# Altium PCB ignore_testboard.PcbDoc (part 2 of 2)
Units mm, origin at the board's own origin, x right, y up, seen from the top; angles counter-clockwise.
Board outline 90 x 50 mm, 2 copper layers (Top Layer, Bottom Layer); 147 components, 148 nets, 497 pads, 0 vias.
Unrouted connection lines stored in the file: 235.
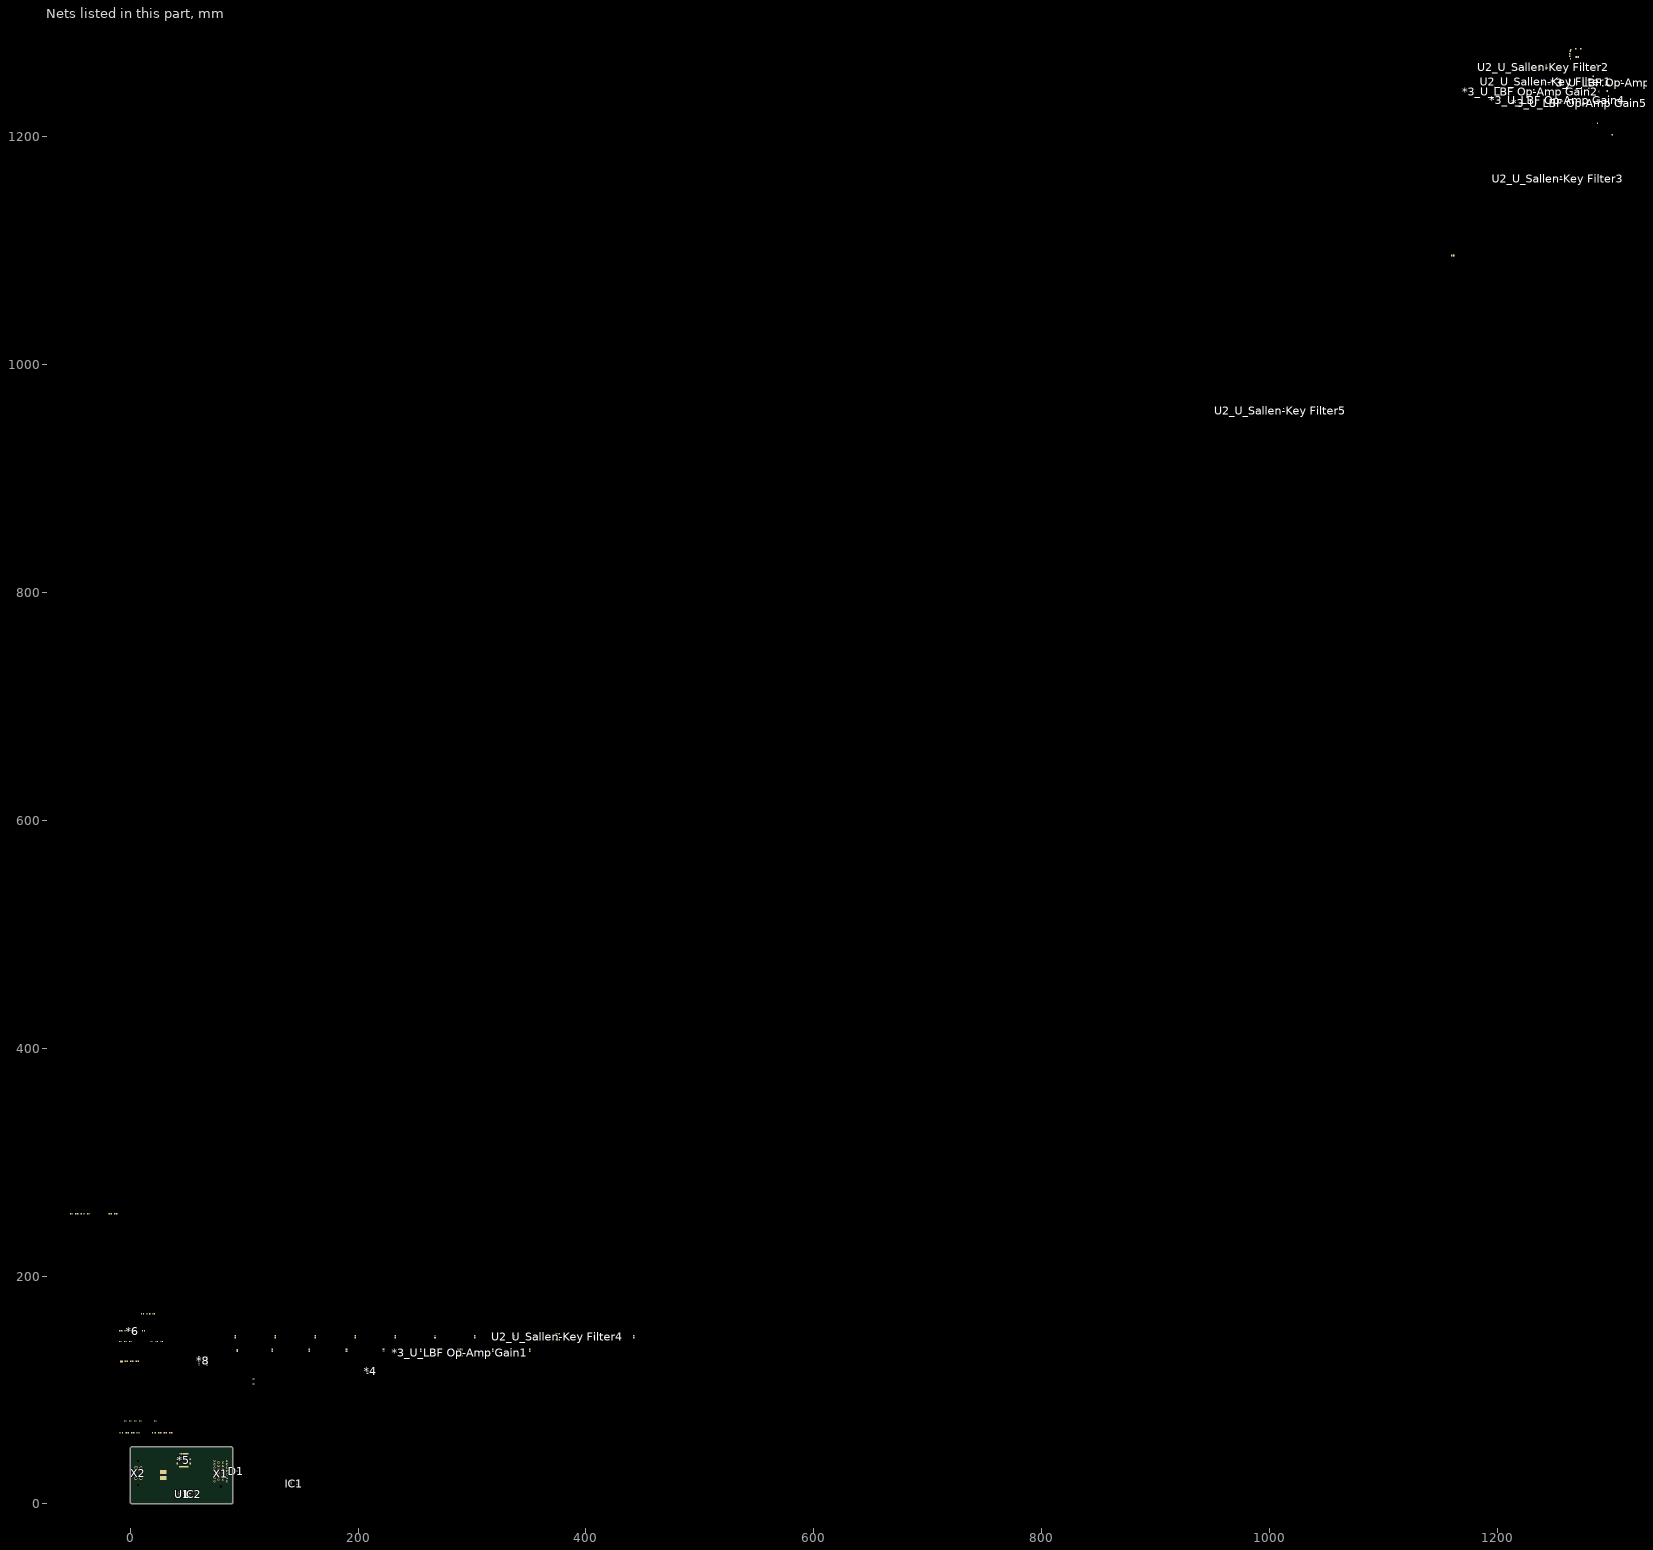
[diagram p2: the nets of this part, all layers, seen from the top]

## Part data
*1 *2 *7: library part 2, Manufacturer_id=1, Package=0805, Brightness=7mcd, Drawer_id=1, Id=20mA, idLED=2, Link=https://www.digikey.com/product-detail/en/visual-communications-company-vcc/CMD17-21VGD-TR8/L62505CT-ND/254936, Name=CMD17_0805_GREEN, Vf=2.1V
"*3_U_LBF Op-Amp Gain1" "*3_U_LBF Op-Amp Gain2" "*3_U_LBF Op-Amp Gain3" "*3_U_LBF Op-Amp Gain4" "*3_U_LBF Op-Amp Gain5" "U2_U_Sallen-Key Filter1" "U2_U_Sallen-Key Filter2" "U2_U_Sallen-Key Filter3" "U2_U_Sallen-Key Filter4" "U2_U_Sallen-Key Filter5": library part 1, "IC OPAMP JFET 5MHZ 8SO", Package=8-SO, Supplier1PartNo=LT1057IS8#PBF-ND, Supply_Voltage=10~18, Amplifier_Type=JFET, Created_By="Albert Panuco", Drawer_id=1, GBW=5MHz, idOp_Amp=1, Link=https://www.digikey.com/product-detail/en/linear-technology-analog-devices/LT1057IS8-PBF/LT1057IS8-PBF-ND/961410, Manufacturer_id=1, MfrPartNo=LT1057IS8#PBF, Name="OPAMP JFET", Num_Circuits=2, Slew_Rate="13 V/us", Supplier1=Digikey
*4: library part 14, "IC REG SWTCHD CAP INV 10MA 8SOIC", Current_Rating=10mA, Manufacturer_id=1, MfrPartNo=MAX680CSA, Package=SOIC-8, ComponentLink1Description=Null, ComponentLink1URL=Null, Created_By="Albert Panuco", Drawer_id=1, Dropout_Voltage=Null, idPMIC_Lin=14, Link=https://www.digikey.com/product-detail/en/maxim-integrated/MAX680CSA/MAX680CSA-ND/142563, Name=MAX680CSA, Num_Outputs=2, Output_Config=Fixed, Power=Null, Supplier1=Null, Supplier1PartNo=Null, Updated_By=Null, Vin(Max)=6V, Vin(Min)=2V, Vout(Max)=10V, Vout(Min)=+2Vin, Vout_Type=Null
*5 *10: library part 1, Drawer_id=1, Manufacturer_id=1
  *5: idMCU=1, Name="MKE18F512VLH16 MCU"
  *10: idLED=1, Name=LED_0805_RED, Vf=0.7V
*6: library part 6, "MOSFET N-CHANNEL 30V 5A SOT23", Manufacturer_id=1, Package=SOT-23, Created_By=Angel, Drawer_id=1, Id=5A, idFETs=6, Link=https://www.digikey.com/product-detail/en/micro-commercial-co/SI3434-TP/SI3434-TPMSCT-ND/7681700, MfrPartNo=SI3434-TP, Name=SI3434-TP, Num_Circuits=1, Rds_On=44Ohms, Supplier1=Digi-Key, Vdss=30V, Vgs(Max)=1V, Vgs(typ)=800mV
*8: library part 3, Manufacturer_id=1, Created_By=Kyle, Drawer_id=1, idIC_Interface=3, Link=https://www.digikey.com/product-detail/en/ftdi-future-technology-devices-international-ltd/FT232RL-REEL/768-1007-1-ND/1836402, MfrPartNo=FT232RL, Name="USB FTDI", Protocol=UART, Vin(Max)=5.25, Vin(Min)=3.3
*9: library part 2, Manufacturer_id=1, Brightness=35mcd, Drawer_id=1, Id=20mA, idLED=2, Name=LED_0805_GREEN, Vf=2V
C1 C2 C3 C4: library part 711, Dielectric=Ceramic, Manufacturer_id=1, Package="CAP 0805/2012", Voltage_Rating=25V, Created_By="Nick Mah", Created_Date=10/20/2018, Drawer_id=1, idCapacitor=711, Name="Cap_2.2uf_25V_CAP 0805/2012"
C5: library part 943, Dielectric=Ceramic, Manufacturer_id=1, Package="CAP 0603/1608", Voltage_Rating=50V, Created_By="Nick Mah", Created_Date=10/20/2018, Drawer_id=1, idCapacitor=943, Name="Cap_0.10uf_50V_CAP 0603/1608"
C6: library part 929, Dielectric=Ceramic, Manufacturer_id=1, Package="CAP 0603/1608", Voltage_Rating=50V, Created_By="Nick Mah", Created_Date=10/20/2018, Drawer_id=1, idCapacitor=929, Name="Cap_4700pf_50V_CAP 0603/1608"
"C7_U_LBF Op-Amp Gain1" "C7_U_LBF Op-Amp Gain2" "C7_U_LBF Op-Amp Gain3" "C7_U_LBF Op-Amp Gain4" "C7_U_LBF Op-Amp Gain5" "C8_U_LBF Op-Amp Gain1" "C8_U_LBF Op-Amp Gain2" "C8_U_LBF Op-Amp Gain3" "C8_U_LBF Op-Amp Gain4" "C8_U_LBF Op-Amp Gain5": library part 341, Dielectric=Ceramic, Manufacturer_id=1, Package="CAP 0805/2012", Voltage_Rating=16V, Created_By="Nick Mah", Created_Date=10/20/2018, Drawer_id=1, idCapacitor=341, Name="Cap_0.047uf_16V_CAP 0805/2012"
C9 C10 C11 C12: library part 353, Dielectric=Ceramic, Manufacturer_id=1, Package="CAP 0805/2012", Voltage_Rating=16V, Created_By="Nick Mah", Created_Date=10/20/2018, Drawer_id=1, idCapacitor=353, Name="Cap_4.7uf_16V_CAP 0805/2012"
C13: library part 223, Dielectric=Ceramic, Manufacturer_id=1, Package="CAP 0603/1608", Voltage_Rating=16V, Created_By="Nick Mah", Created_Date=10/20/2018, Drawer_id=1, idCapacitor=223, Name="Cap_0.10uf_16V_CAP 0603/1608"
C14 C16 C23 C24 C25: library part 583, Dielectric=Ceramic, Manufacturer_id=1, Package="CAP 0603/1608", Voltage_Rating=25V, Created_By="Nick Mah", Created_Date=10/20/2018, Drawer_id=1, idCapacitor=583, Name="Cap_0.10uf_25V_CAP 0603/1608"
C15: library part 529, Dielectric=Ceramic, Manufacturer_id=1, Package="CAP 0603/1608", Voltage_Rating=25V, Created_By="Nick Mah", Created_Date=10/20/2018, Drawer_id=1, idCapacitor=529, Name="Cap_100pf_25V_CAP 0603/1608"
"C17_U_Sallen-Key Filter1" "C17_U_Sallen-Key Filter2" "C17_U_Sallen-Key Filter3" "C17_U_Sallen-Key Filter4" "C17_U_Sallen-Key Filter5" "C18_U_Sallen-Key Filter1" "C18_U_Sallen-Key Filter2" "C18_U_Sallen-Key Filter3" "C18_U_Sallen-Key Filter4" "C18_U_Sallen-Key Filter5" "C20_U_Sallen-Key Filter1" "C20_U_Sallen-Key Filter2" "C20_U_Sallen-Key Filter3" "C20_U_Sallen-Key Filter4" "C20_U_Sallen-Key Filter5" "C21_U_Sallen-Key Filter1" "C21_U_Sallen-Key Filter2" "C21_U_Sallen-Key Filter3" "C21_U_Sallen-Key Filter4" "C21_U_Sallen-Key Filter5": library part 703, Dielectric=Ceramic, Manufacturer_id=1, Package="CAP 0805/2012", Voltage_Rating=25V, Created_By="Nick Mah", Created_Date=10/20/2018, Drawer_id=1, idCapacitor=703, Name="Cap_0.10uf_25V_CAP 0805/2012"
"C19_U_Sallen-Key Filter1" "C19_U_Sallen-Key Filter2" "C19_U_Sallen-Key Filter3" "C19_U_Sallen-Key Filter4" "C19_U_Sallen-Key Filter5" "C22_U_Sallen-Key Filter1" "C22_U_Sallen-Key Filter2" "C22_U_Sallen-Key Filter3" "C22_U_Sallen-Key Filter4" "C22_U_Sallen-Key Filter5": library part 681, Dielectric=Ceramic, Manufacturer_id=1, Package="CAP 0805/2012", Voltage_Rating=25V, Created_By="Nick Mah", Created_Date=10/20/2018, Drawer_id=1, idCapacitor=681, Name="Cap_2200pf_25V_CAP 0805/2012"
D1: library part 7, "ESD Protection Diode", Manufacturer_id=1, Package=SOT-23, Power=350W, Supplier1PartNo=NUP1105LT1GOSCT-ND, ComponentLink1URL=https://www.digikey.com/product-detail/en/on-semiconductor/NUP1105LT1G/NUP1105LT1GOSCT-ND/2122067, Drawer_id=1, Ic=8A, idDiode=7, Link=https://www.digikey.com/product-detail/en/on-semiconductor/NUP1105LT1G/NUP1105LT1GOSCT-ND/2122067, MfrPartNo=NUP1105LT1G, Name=SOT-23_350W_Zener, Num_Circuits=1, Supplier1=Digikey, Type=Zener
D5: library part 12, "DIODE SCHOTTKY 30V 5A TMINIP2", Manufacturer_id=1, MfrPartNo=DB2431200L, Package=SOD-128, Power=30V, Supplier1PartNo=DB2431200LCT-ND, ComponentLink1Description=Datasheet, ComponentLink1URL=https://industrial.panasonic.com/content/data/SC/ds/ds4/DB2431200L_E.pdf, Drawer_id=1, Ic=5A, idDiode=12, Link=https://www.digikey.com/product-detail/en/panasonic-electronic-components/DB2431200L/DB2431200LCT-ND/3884430, Name=DB2431200L, Num_Circuits=1, Supplier1=Digi-Key, Type=Schottky
IC1 IC2: library part 10, "IC VREF SERIES 5V 8SOIC", Manufacturer_id=1, MfrPartNo=MAX6350CSA+, Package=SOIC-8, Created_By="Albert Panuco", Drawer_id=1, idPMIC_Lin=10, Link=https://www.digikey.com/product-detail/en/maxim-integrated/MAX6350CSA/MAX6350CSA-ND/1867176, Name=MAX6350CSA+_5V_Ref, Num_Outputs=1, Output_Config=5V, Updated_By="Albert Panuco", Vin(Max)=40V, Vout(Max)=12V
"PTC Fuse1": library part 4, "Fuse", Manufacturer_id=1, MfrPartNo=2920L200, Created_By="Eunice Bernardo", Created_Date=10/27/2018, Drawer_id=1, I_hold=2A, I_max=40A, I_trip=4A, idFuse=4, LatestRevisionDate=17-Jul-2002, LatestRevisionNote="Re-released for DXP Platform.", Link=https://www.digikey.com/product-detail/en/littelfuse-inc/2920L200-24DR/F2872TR-ND/1211346, Name="PTC Poly Fuse Resettable", PackageDescription="Thru-Hole; 2 Leads", PackageReference=PIN-W2/E2.8, Published=8-Jun-2000, Publisher="Altium Limited"
R1 R2 R16: library part 497, Manufacturer_id=1, Package=0805, Power=1/10W, Tolerance=1%, ComponentLink1Description=Datasheet, Created_By="Nick Mah", Created_Date=2018-10-20, Drawer_id=1, idResistor=497, Name=Res_470_0805_1/10W_1%, Supplier 1=Digi-Key
R3 R4: library part 1340, Manufacturer_id=1, Package=0603, Power=1/10W, Tolerance=5%, ComponentLink1Description=Datasheet, Created_By="Nick Mah", Created_Date=2018-10-20, Drawer_id=1, idResistor=1340, Name=Res_62_0603_1/10W_5%, Supplier 1=Digi-Key
R5: library part 2293, Manufacturer_id=1, Package=0603, Power=1/10W, Tolerance=10%, ComponentLink1Description=Datasheet, Created_By="Nick Mah", Created_Date=2018-10-20, Drawer_id=1, idResistor=2293, Name=Res_100_0603_1/10W_10%, Supplier 1=Digi-Key
"R6_U_LBF Op-Amp Gain1" "R6_U_LBF Op-Amp Gain2" "R6_U_LBF Op-Amp Gain3" "R6_U_LBF Op-Amp Gain4" "R6_U_LBF Op-Amp Gain5" "R7_U_LBF Op-Amp Gain1" "R7_U_LBF Op-Amp Gain2" "R7_U_LBF Op-Amp Gain3" "R7_U_LBF Op-Amp Gain4" "R7_U_LBF Op-Amp Gain5" "R8_U_LBF Op-Amp Gain1" "R8_U_LBF Op-Amp Gain2" "R8_U_LBF Op-Amp Gain3" "R8_U_LBF Op-Amp Gain4" "R8_U_LBF Op-Amp Gain5" "R9_U_LBF Op-Amp Gain1" "R9_U_LBF Op-Amp Gain2" "R9_U_LBF Op-Amp Gain3" "R9_U_LBF Op-Amp Gain4" "R9_U_LBF Op-Amp Gain5" "R10_U_LBF Op-Amp Gain1" "R10_U_LBF Op-Amp Gain2" "R10_U_LBF Op-Amp Gain3" "R10_U_LBF Op-Amp Gain4" "R10_U_LBF Op-Amp Gain5" "R11_U_LBF Op-Amp Gain1" "R11_U_LBF Op-Amp Gain2" "R11_U_LBF Op-Amp Gain3" "R11_U_LBF Op-Amp Gain4" "R11_U_LBF Op-Amp Gain5": library part 513, Manufacturer_id=1, Package=0805, Power=1/10W, Tolerance=1%, ComponentLink1Description=Datasheet, Created_By="Nick Mah", Created_Date=2018-10-20, Drawer_id=1, idResistor=513, Name=Res_2.2k_0805_1/10W_1%, Supplier 1=Digi-Key
R12: library part 313, Manufacturer_id=1, Package=0603, Power=1/10W, Tolerance=1%, ComponentLink1Description=Datasheet, Created_By="Nick Mah", Created_Date=2018-10-20, Drawer_id=1, idResistor=313, Name=Res_10k_0603_1/10W_1%, Supplier 1=Digi-Key
R13: library part 1393, Manufacturer_id=1, Package=0603, Power=1/10W, Tolerance=5%, ComponentLink1Description=Datasheet, Created_By="Nick Mah", Created_Date=2018-10-20, Drawer_id=1, idResistor=1393, Name=Res_10k_0603_1/10W_5%, Supplier 1=Digi-Key
R17: library part 545, Manufacturer_id=1, Package=0805, Power=1/10W, Tolerance=1%, ComponentLink1Description=Datasheet, Created_By="Nick Mah", Created_Date=2018-10-20, Drawer_id=1, idResistor=545, Name=Res_47k_0805_1/10W_1%, Supplier 1=Digi-Key
"R18_U_Sallen-Key Filter1" "R18_U_Sallen-Key Filter2" "R18_U_Sallen-Key Filter3" "R18_U_Sallen-Key Filter4" "R18_U_Sallen-Key Filter5" "R20_U_Sallen-Key Filter1" "R20_U_Sallen-Key Filter2" "R20_U_Sallen-Key Filter3" "R20_U_Sallen-Key Filter4" "R20_U_Sallen-Key Filter5": library part 538, Manufacturer_id=1, Package=0805, Power=1/10W, Tolerance=1%, ComponentLink1Description=Datasheet, Created_By="Nick Mah", Created_Date=2018-10-20, Drawer_id=1, idResistor=538, Name=Res_24k_0805_1/10W_1%, Supplier 1=Digi-Key
"R19_U_Sallen-Key Filter1" "R19_U_Sallen-Key Filter2" "R19_U_Sallen-Key Filter3" "R19_U_Sallen-Key Filter4" "R19_U_Sallen-Key Filter5" "R21_U_Sallen-Key Filter1" "R21_U_Sallen-Key Filter2" "R21_U_Sallen-Key Filter3" "R21_U_Sallen-Key Filter4" "R21_U_Sallen-Key Filter5": library part 528, Manufacturer_id=1, Package=0805, Power=1/10W, Tolerance=1%, ComponentLink1Description=Datasheet, Created_By="Nick Mah", Created_Date=2018-10-20, Drawer_id=1, idResistor=528, Name=Res_9.1k_0805_1/10W_1%, Supplier 1=Digi-Key
R22 R23 R24 R25: library part 721, Manufacturer_id=1, Package=0805, Power=1/4W, Tolerance=1%, ComponentLink1Description=Datasheet, Created_By="Nick Mah", Created_Date=2018-10-20, Drawer_id=1, idResistor=721, Name=Res_1.0k_0805_1/4W_1%, Supplier 1=Digi-Key
U1: library part 5, Manufacturer_id=1, MfrPartNo=MCP2561, Package=SOIC-8, Created_By="Angel Delgado", Data_Rate=1Mbps, Drawer_id=1, idIC_Interface=5, Link=https://www.digikey.com/product-detail/en/microchip-technology/MCP2561T-E-SN/MCP2561T-E-SNCT-ND/5148846, Name="CAN Transceiver", Num_Circuits=1, Protocol=CAN, Type=Transceiver, Vin(Max)=5.5V, Vin(Min)=4.5V
X1: library part 7, "Straight Angle 26Pos AMPSeal", Manufacturer_id=5, Supplier1PartNo=A123256-ND, Voltage_Rating=250V, ComponentLink1Description=Drawing, ComponentLink1URL=https://www.te.com/commerce/DocumentDelivery/DDEController?Action=srchrtrv&DocNm=1437288-6&DocType=Customer+Drawing&DocLang=JP, Created_By=Nick, Drawer_id=1, idConn=7, Link=https://www.digikey.com/product-detail/en/te-connectivity-amp-connectors/6437288-6/A123256-ND/2329274, MfrPartNo=6437288-6, Name="AMP SuperSeal Straight", Num_Contacts=26, Num_Rows=4, Pitch=3mm, Supplier1=Digi-Key
X2: library part 15, "2 row 4 pin Board", Manufacturer_id=1, ComponentLink1Description=Datasheet, Created_By=Angel, Drawer_id=1, idConn=15, Link=https://www.te.com/usa-en/product-DTF13-4P.html, MfrPartNo=DTF13-4P, Name=DTF13-4P, Num_Contacts=4, Supplier1=TE

## Nets (pads, with @x,y where several pads share a name; then routed paths per layer and width w, separated by ;. In a path a pad name is that pad's centre, name@x,y a point inside that pad or via, vN(x,y) a via of type N, cw(c..) or ccw(c..) an arc to the next point about the centre after c; other vN are vias at no path point)
12V: "PTC Fuse1.1" *6.3 C1.2 C3.2 D5.2 IC1.2 IC2.2 R16.2
"12V PWR": "PTC Fuse1.2" X2.1
+10V: "*3_U_LBF Op-Amp Gain1.6" "*3_U_LBF Op-Amp Gain2.6" "*3_U_LBF Op-Amp Gain3.6" "*3_U_LBF Op-Amp Gain4.6" "*3_U_LBF Op-Amp Gain5.6" "C18_U_Sallen-Key Filter1.2" "C18_U_Sallen-Key Filter2.2" "C18_U_Sallen-Key Filter3.2" "C18_U_Sallen-Key Filter4.2" "C18_U_Sallen-Key Filter5.2" "C21_U_Sallen-Key Filter1.1" "U2_U_Sallen-Key Filter1.2" "U2_U_Sallen-Key Filter1.6" "U2_U_Sallen-Key Filter2.6" "U2_U_Sallen-Key Filter3.6" "U2_U_Sallen-Key Filter4.6" "U2_U_Sallen-Key Filter5.6" *4.8 C9.1
-10V: "*3_U_LBF Op-Amp Gain1.2" "*3_U_LBF Op-Amp Gain2.2" "*3_U_LBF Op-Amp Gain3.2" "*3_U_LBF Op-Amp Gain4.2" "*3_U_LBF Op-Amp Gain5.2" "C21_U_Sallen-Key Filter2.1" "C21_U_Sallen-Key Filter3.1" "C21_U_Sallen-Key Filter4.1" "C21_U_Sallen-Key Filter5.1" "U2_U_Sallen-Key Filter2.2" "U2_U_Sallen-Key Filter3.2" "U2_U_Sallen-Key Filter4.2" "U2_U_Sallen-Key Filter5.2" *4.4 C12.2
AGND: "C8_U_LBF Op-Amp Gain1.1" "C8_U_LBF Op-Amp Gain2.1" "C8_U_LBF Op-Amp Gain3.1" "C8_U_LBF Op-Amp Gain4.1" "C8_U_LBF Op-Amp Gain5.1" "C18_U_Sallen-Key Filter1.1" "C18_U_Sallen-Key Filter2.1" "C18_U_Sallen-Key Filter3.1" "C18_U_Sallen-Key Filter4.1" "C18_U_Sallen-Key Filter5.1" "C19_U_Sallen-Key Filter1.1" "C19_U_Sallen-Key Filter2.1" "C19_U_Sallen-Key Filter3.1" "C19_U_Sallen-Key Filter4.1" "C19_U_Sallen-Key Filter5.1" "C21_U_Sallen-Key Filter1.2" "C21_U_Sallen-Key Filter2.2" "C21_U_Sallen-Key Filter3.2" "C21_U_Sallen-Key Filter4.2" "C21_U_Sallen-Key Filter5.2" "C22_U_Sallen-Key Filter1.1" "C22_U_Sallen-Key Filter2.1" "C22_U_Sallen-Key Filter3.1" "C22_U_Sallen-Key Filter4.1" "C22_U_Sallen-Key Filter5.1" "R6_U_LBF Op-Amp Gain1.1" "R6_U_LBF Op-Amp Gain2.1" "R6_U_LBF Op-Amp Gain3.1" "R6_U_LBF Op-Amp Gain4.1" "R6_U_LBF Op-Amp Gain5.1" "R9_U_LBF Op-Amp Gain1.1" "R9_U_LBF Op-Amp Gain2.1" "R9_U_LBF Op-Amp Gain3.1" "R9_U_LBF Op-Amp Gain4.1" "R9_U_LBF Op-Amp Gain5.1" *1.2 *2.2 *4.5 *5.10 *5.40 *8.7 *8.18 *8.21 *8.25 *8.26 C1.1 C2.1 C3.1 C4.1 C5.1 C6.1 C12.1 C13.1 C14.1 C15.1 C16.1 C24.1 C25.1 D1.3 IC1.4 IC2.4 R5.1 U1.2 X1.19 X1.20 X1.21 X1.22 X1.23 X1.24 X1.25 X1.26 X2.2
AVCC: *4.6 *5.8 *5.9 C4.2 C9.2 C14.2 IC2.6 R2.1 X1.6 X1.7 X1.8 X1.9 X1.10 X1.11 X1.12 X1.13
CAN_H: D1.1 R4.2 U1.7 X2.4
CAN_L: D1.2 R3.1 U1.6 X2.3
D_N: *8.16
D_P: *8.15
DVCC: *5.7 *5.41 *8.4 *8.19 *8.20 C2.2 C5.2 C15.2 C16.2 C24.2 IC1.6 R1.1 R12.2 R13.2 U1.3
DVCC_5V: R24.2 R25.2
FTDI_GREEN: *8.23 *9.2
FTDI_RED: *8.22 *10.2
FTDI_UART_RX: *5.48 R23.2
FTDI_UART_TX: *5.47 R22.2
GND: *6.2 *7.2 D5.1 R17.1
"IN 1": "R18_U_Sallen-Key Filter2.1" X1.1
"IN 2": "R20_U_Sallen-Key Filter2.1" X1.2
"IN 3": "R18_U_Sallen-Key Filter3.1" X1.3
"IN 4": "R20_U_Sallen-Key Filter3.1" X1.4
"IN 5": "R18_U_Sallen-Key Filter5.1" X1.5
"IN 6": "R20_U_Sallen-Key Filter5.1" X1.14
"IN 7": "R18_U_Sallen-Key Filter4.1" X1.15
"IN 8": "R20_U_Sallen-Key Filter4.1" X1.16
"IN 9": "R18_U_Sallen-Key Filter1.1" X1.17
"IN 10": "R20_U_Sallen-Key Filter1.1" X1.18
JTAG_TMS: R12.1
Net*1_1: *1.1 R1.2
Net*2_1: *2.1 R2.2
"Net*3_U_LBF Op-Amp Gain1_1": "*3_U_LBF Op-Amp Gain1.1" "C7_U_LBF Op-Amp Gain1.2" "R8_U_LBF Op-Amp Gain1.2"
"Net*3_U_LBF Op-Amp Gain1_3": "*3_U_LBF Op-Amp Gain1.3" "R9_U_LBF Op-Amp Gain1.2" "R10_U_LBF Op-Amp Gain1.1"
"Net*3_U_LBF Op-Amp Gain1_4": "*3_U_LBF Op-Amp Gain1.4" "C8_U_LBF Op-Amp Gain1.2" "R11_U_LBF Op-Amp Gain1.2"
"Net*3_U_LBF Op-Amp Gain1_5": "*3_U_LBF Op-Amp Gain1.5" "R10_U_LBF Op-Amp Gain1.2" *5.32
"Net*3_U_LBF Op-Amp Gain1_7": "*3_U_LBF Op-Amp Gain1.7" "R7_U_LBF Op-Amp Gain1.2" *5.31
"Net*3_U_LBF Op-Amp Gain1_8": "*3_U_LBF Op-Amp Gain1.8" "R6_U_LBF Op-Amp Gain1.2" "R7_U_LBF Op-Amp Gain1.1"
"Net*3_U_LBF Op-Amp Gain2_1": "*3_U_LBF Op-Amp Gain2.1" "C7_U_LBF Op-Amp Gain2.2" "R8_U_LBF Op-Amp Gain2.2"
"Net*3_U_LBF Op-Amp Gain2_3": "*3_U_LBF Op-Amp Gain2.3" "R9_U_LBF Op-Amp Gain2.2" "R10_U_LBF Op-Amp Gain2.1"
"Net*3_U_LBF Op-Amp Gain2_4": "*3_U_LBF Op-Amp Gain2.4" "C8_U_LBF Op-Amp Gain2.2" "R11_U_LBF Op-Amp Gain2.2"
"Net*3_U_LBF Op-Amp Gain2_5": "*3_U_LBF Op-Amp Gain2.5" "R10_U_LBF Op-Amp Gain2.2" *5.30
"Net*3_U_LBF Op-Amp Gain2_7": "*3_U_LBF Op-Amp Gain2.7" "R7_U_LBF Op-Amp Gain2.2" *5.29
"Net*3_U_LBF Op-Amp Gain2_8": "*3_U_LBF Op-Amp Gain2.8" "R6_U_LBF Op-Amp Gain2.2" "R7_U_LBF Op-Amp Gain2.1"
"Net*3_U_LBF Op-Amp Gain3_1": "*3_U_LBF Op-Amp Gain3.1" "C7_U_LBF Op-Amp Gain3.2" "R8_U_LBF Op-Amp Gain3.2"
"Net*3_U_LBF Op-Amp Gain3_3": "*3_U_LBF Op-Amp Gain3.3" "R9_U_LBF Op-Amp Gain3.2" "R10_U_LBF Op-Amp Gain3.1"
"Net*3_U_LBF Op-Amp Gain3_4": "*3_U_LBF Op-Amp Gain3.4" "C8_U_LBF Op-Amp Gain3.2" "R11_U_LBF Op-Amp Gain3.2"
"Net*3_U_LBF Op-Amp Gain3_5": "*3_U_LBF Op-Amp Gain3.5" "R10_U_LBF Op-Amp Gain3.2" *5.28
"Net*3_U_LBF Op-Amp Gain3_7": "*3_U_LBF Op-Amp Gain3.7" "R7_U_LBF Op-Amp Gain3.2" *5.27
"Net*3_U_LBF Op-Amp Gain3_8": "*3_U_LBF Op-Amp Gain3.8" "R6_U_LBF Op-Amp Gain3.2" "R7_U_LBF Op-Amp Gain3.1"
"Net*3_U_LBF Op-Amp Gain4_1": "*3_U_LBF Op-Amp Gain4.1" "C7_U_LBF Op-Amp Gain4.2" "R8_U_LBF Op-Amp Gain4.2"
"Net*3_U_LBF Op-Amp Gain4_3": "*3_U_LBF Op-Amp Gain4.3" "R9_U_LBF Op-Amp Gain4.2" "R10_U_LBF Op-Amp Gain4.1"
"Net*3_U_LBF Op-Amp Gain4_4": "*3_U_LBF Op-Amp Gain4.4" "C8_U_LBF Op-Amp Gain4.2" "R11_U_LBF Op-Amp Gain4.2"
"Net*3_U_LBF Op-Amp Gain4_5": "*3_U_LBF Op-Amp Gain4.5" "R10_U_LBF Op-Amp Gain4.2" *5.26
"Net*3_U_LBF Op-Amp Gain4_7": "*3_U_LBF Op-Amp Gain4.7" "R7_U_LBF Op-Amp Gain4.2" *5.25
"Net*3_U_LBF Op-Amp Gain4_8": "*3_U_LBF Op-Amp Gain4.8" "R6_U_LBF Op-Amp Gain4.2" "R7_U_LBF Op-Amp Gain4.1"
"Net*3_U_LBF Op-Amp Gain5_1": "*3_U_LBF Op-Amp Gain5.1" "C7_U_LBF Op-Amp Gain5.2" "R8_U_LBF Op-Amp Gain5.2"
"Net*3_U_LBF Op-Amp Gain5_3": "*3_U_LBF Op-Amp Gain5.3" "R9_U_LBF Op-Amp Gain5.2" "R10_U_LBF Op-Amp Gain5.1"
"Net*3_U_LBF Op-Amp Gain5_4": "*3_U_LBF Op-Amp Gain5.4" "C8_U_LBF Op-Amp Gain5.2" "R11_U_LBF Op-Amp Gain5.2"
"Net*3_U_LBF Op-Amp Gain5_5": "*3_U_LBF Op-Amp Gain5.5" "R10_U_LBF Op-Amp Gain5.2" *5.21
"Net*3_U_LBF Op-Amp Gain5_7": "*3_U_LBF Op-Amp Gain5.7" "R7_U_LBF Op-Amp Gain5.2" *5.20
"Net*3_U_LBF Op-Amp Gain5_8": "*3_U_LBF Op-Amp Gain5.8" "R6_U_LBF Op-Amp Gain5.2" "R7_U_LBF Op-Amp Gain5.1"
Net*4_1: *4.1 C10.1
Net*4_2: *4.2 C11.2
Net*4_3: *4.3 C11.1
Net*4_7: *4.7 C10.2
Net*5_1: *5.1
Net*5_2: *5.2
Net*5_3: *5.3
Net*5_4: *5.4
Net*5_11: *5.11
Net*5_12: *5.12
Net*5_13: *5.13
Net*5_14: *5.14
Net*5_15: *5.15
Net*5_16: *5.16
Net*5_17: *5.17
Net*5_18: *5.18
Net*5_19: *5.19
Net*5_22: *5.22
Net*5_23: *5.23
Net*5_24: *5.24
Net*5_33: *5.33
Net*5_34: *5.34
Net*5_35: *5.35
Net*5_36: *5.36
Net*5_37: *5.37
Net*5_38: *5.38
Net*5_39: *5.39
Net*5_42: *5.42
Net*5_43: *5.43
Net*5_44: *5.44
Net*5_45: *5.45
Net*5_46: *5.46
Net*5_49: *5.49
Net*5_50: *5.50
Net*5_51: *5.51
Net*5_52: *5.52
Net*5_53: *5.53
Net*5_54: *5.54
Net*5_55: *5.55
Net*5_56: *5.56
Net*5_57: *5.57
Net*5_59: *5.59
Net*5_60: *5.60
Net*5_61: *5.61
Net*5_63: *5.63 R13.1
Net*6_1: *6.1 R17.2
Net*7_1: *7.1 R16.1
Net*8_1: *8.1 R22.1
Net*8_2: *8.2 C23.1
Net*8_5: *8.5 R23.1
Net*9_1: *9.1 R24.1
Net*10_1: *10.1 R25.1
NetC6_2: C6.2 R3.2 R4.1 U1.5
"NetC17_U_Sallen-Key Filter1_1": "C17_U_Sallen-Key Filter1.1" "R18_U_Sallen-Key Filter1.2" "R19_U_Sallen-Key Filter1.1"
"NetC17_U_Sallen-Key Filter1_2": "C17_U_Sallen-Key Filter1.2" "R8_U_LBF Op-Amp Gain1.1" "U2_U_Sallen-Key Filter1.7" "U2_U_Sallen-Key Filter1.8"
"NetC17_U_Sallen-Key Filter2_1": "C17_U_Sallen-Key Filter2.1" "R18_U_Sallen-Key Filter2.2" "R19_U_Sallen-Key Filter2.1"
"NetC17_U_Sallen-Key Filter2_2": "C17_U_Sallen-Key Filter2.2" "R8_U_LBF Op-Amp Gain5.1" "U2_U_Sallen-Key Filter2.7" "U2_U_Sallen-Key Filter2.8"
"NetC17_U_Sallen-Key Filter3_1": "C17_U_Sallen-Key Filter3.1" "R18_U_Sallen-Key Filter3.2" "R19_U_Sallen-Key Filter3.1"
"NetC17_U_Sallen-Key Filter3_2": "C17_U_Sallen-Key Filter3.2" "R8_U_LBF Op-Amp Gain4.1" "U2_U_Sallen-Key Filter3.7" "U2_U_Sallen-Key Filter3.8"
"NetC17_U_Sallen-Key Filter4_1": "C17_U_Sallen-Key Filter4.1" "R18_U_Sallen-Key Filter4.2" "R19_U_Sallen-Key Filter4.1"
"NetC17_U_Sallen-Key Filter4_2": "C17_U_Sallen-Key Filter4.2" "R8_U_LBF Op-Amp Gain2.1" "U2_U_Sallen-Key Filter4.7" "U2_U_Sallen-Key Filter4.8"
"NetC17_U_Sallen-Key Filter5_1": "C17_U_Sallen-Key Filter5.1" "R18_U_Sallen-Key Filter5.2" "R19_U_Sallen-Key Filter5.1"
"NetC17_U_Sallen-Key Filter5_2": "C17_U_Sallen-Key Filter5.2" "R8_U_LBF Op-Amp Gain3.1" "U2_U_Sallen-Key Filter5.7" "U2_U_Sallen-Key Filter5.8"
"NetC20_U_Sallen-Key Filter1_1": "C20_U_Sallen-Key Filter1.1" "R20_U_Sallen-Key Filter1.2" "R21_U_Sallen-Key Filter1.1"
"NetC20_U_Sallen-Key Filter1_2": "C20_U_Sallen-Key Filter1.2" "R11_U_LBF Op-Amp Gain1.1" "U2_U_Sallen-Key Filter1.3" "U2_U_Sallen-Key Filter1.5"
"NetC20_U_Sallen-Key Filter2_1": "C20_U_Sallen-Key Filter2.1" "R20_U_Sallen-Key Filter2.2" "R21_U_Sallen-Key Filter2.1"
"NetC20_U_Sallen-Key Filter2_2": "C20_U_Sallen-Key Filter2.2" "R11_U_LBF Op-Amp Gain5.1" "U2_U_Sallen-Key Filter2.3" "U2_U_Sallen-Key Filter2.5"
"NetC20_U_Sallen-Key Filter3_1": "C20_U_Sallen-Key Filter3.1" "R20_U_Sallen-Key Filter3.2" "R21_U_Sallen-Key Filter3.1"
"NetC20_U_Sallen-Key Filter3_2": "C20_U_Sallen-Key Filter3.2" "R11_U_LBF Op-Amp Gain4.1" "U2_U_Sallen-Key Filter3.3" "U2_U_Sallen-Key Filter3.5"
"NetC20_U_Sallen-Key Filter4_1": "C20_U_Sallen-Key Filter4.1" "R20_U_Sallen-Key Filter4.2" "R21_U_Sallen-Key Filter4.1"
"NetC20_U_Sallen-Key Filter4_2": "C20_U_Sallen-Key Filter4.2" "R11_U_LBF Op-Amp Gain2.1" "U2_U_Sallen-Key Filter4.3" "U2_U_Sallen-Key Filter4.5"
"NetC20_U_Sallen-Key Filter5_1": "C20_U_Sallen-Key Filter5.1" "R20_U_Sallen-Key Filter5.2" "R21_U_Sallen-Key Filter5.1"
"NetC20_U_Sallen-Key Filter5_2": "C20_U_Sallen-Key Filter5.2" "R11_U_LBF Op-Amp Gain3.1" "U2_U_Sallen-Key Filter5.3" "U2_U_Sallen-Key Filter5.5"
"NetC22_U_Sallen-Key Filter1_2": "C22_U_Sallen-Key Filter1.2" "R21_U_Sallen-Key Filter1.2" "U2_U_Sallen-Key Filter1.4"
"NetC22_U_Sallen-Key Filter2_2": "C22_U_Sallen-Key Filter2.2" "R21_U_Sallen-Key Filter2.2" "U2_U_Sallen-Key Filter2.4"
"NetC22_U_Sallen-Key Filter3_2": "C22_U_Sallen-Key Filter3.2" "R21_U_Sallen-Key Filter3.2" "U2_U_Sallen-Key Filter3.4"
"NetC22_U_Sallen-Key Filter4_2": "C22_U_Sallen-Key Filter4.2" "R21_U_Sallen-Key Filter4.2" "U2_U_Sallen-Key Filter4.4"
"NetC22_U_Sallen-Key Filter5_2": "C22_U_Sallen-Key Filter5.2" "R21_U_Sallen-Key Filter5.2" "U2_U_Sallen-Key Filter5.4"
NetR5_2: R5.2 U1.8
"NetR19_U_Sallen-Key Filter1_2": "R19_U_Sallen-Key Filter1.2" "U2_U_Sallen-Key Filter1.1"
"NetR19_U_Sallen-Key Filter2_2": "R19_U_Sallen-Key Filter2.2" "U2_U_Sallen-Key Filter2.1"
"NetR19_U_Sallen-Key Filter3_2": "R19_U_Sallen-Key Filter3.2" "U2_U_Sallen-Key Filter3.1"
"NetR19_U_Sallen-Key Filter4_2": "R19_U_Sallen-Key Filter4.2" "U2_U_Sallen-Key Filter4.1"
"NetR19_U_Sallen-Key Filter5_2": "R19_U_Sallen-Key Filter5.2" "U2_U_Sallen-Key Filter5.1"
RESET: C23.2
RX_CAN: *5.6 U1.4
TX_CAN: *5.5 U1.1
VCC_3V3: *8.17 C25.2
pads on no net: "C7_U_LBF Op-Amp Gain1.1" "C7_U_LBF Op-Amp Gain2.1" "C7_U_LBF Op-Amp Gain3.1" "C7_U_LBF Op-Amp Gain4.1" "C7_U_LBF Op-Amp Gain5.1" "C19_U_Sallen-Key Filter1.2" "C19_U_Sallen-Key Filter2.2" "C19_U_Sallen-Key Filter3.2" "C19_U_Sallen-Key Filter4.2" "C19_U_Sallen-Key Filter5.2" *5.58 *5.62 *5.64 *8.3 *8.6 *8.8 *8.9 *8.10 *8.11 *8.12 *8.13 *8.14 *8.24 *8.27 *8.28 C13.2 IC1.1 IC1.3 IC1.5 IC1.7 IC1.8 IC2.1 IC2.3 IC2.5 IC2.7 IC2.8 X1.27 X2.None

## Text inside footprints (layer, text, board x,y; h text height)
*1: Top Overlay "*" at 22.299,63.008 h1.52
*2: Top Overlay "*" at -6.401,63.008 h1.52
*7: Top Overlay "*" at -1.601,152.508 h1.52
*9: Top Overlay "*" at 17.399,167.208 h1.52
*10: Top Overlay "*" at -40.276,254.973 h1.52